# Altium PCB GT_16u2_Rev2.PcbDoc
Units mm, origin at the board's own origin, x right, y up, seen from the top; angles counter-clockwise.
Board outline 12.05 x 44.95 mm, 2 copper layers (Top Layer, Bottom Layer); 25 components, 23 nets, 90 pads, 26 vias.
Unrouted connection lines stored in the file: 2.
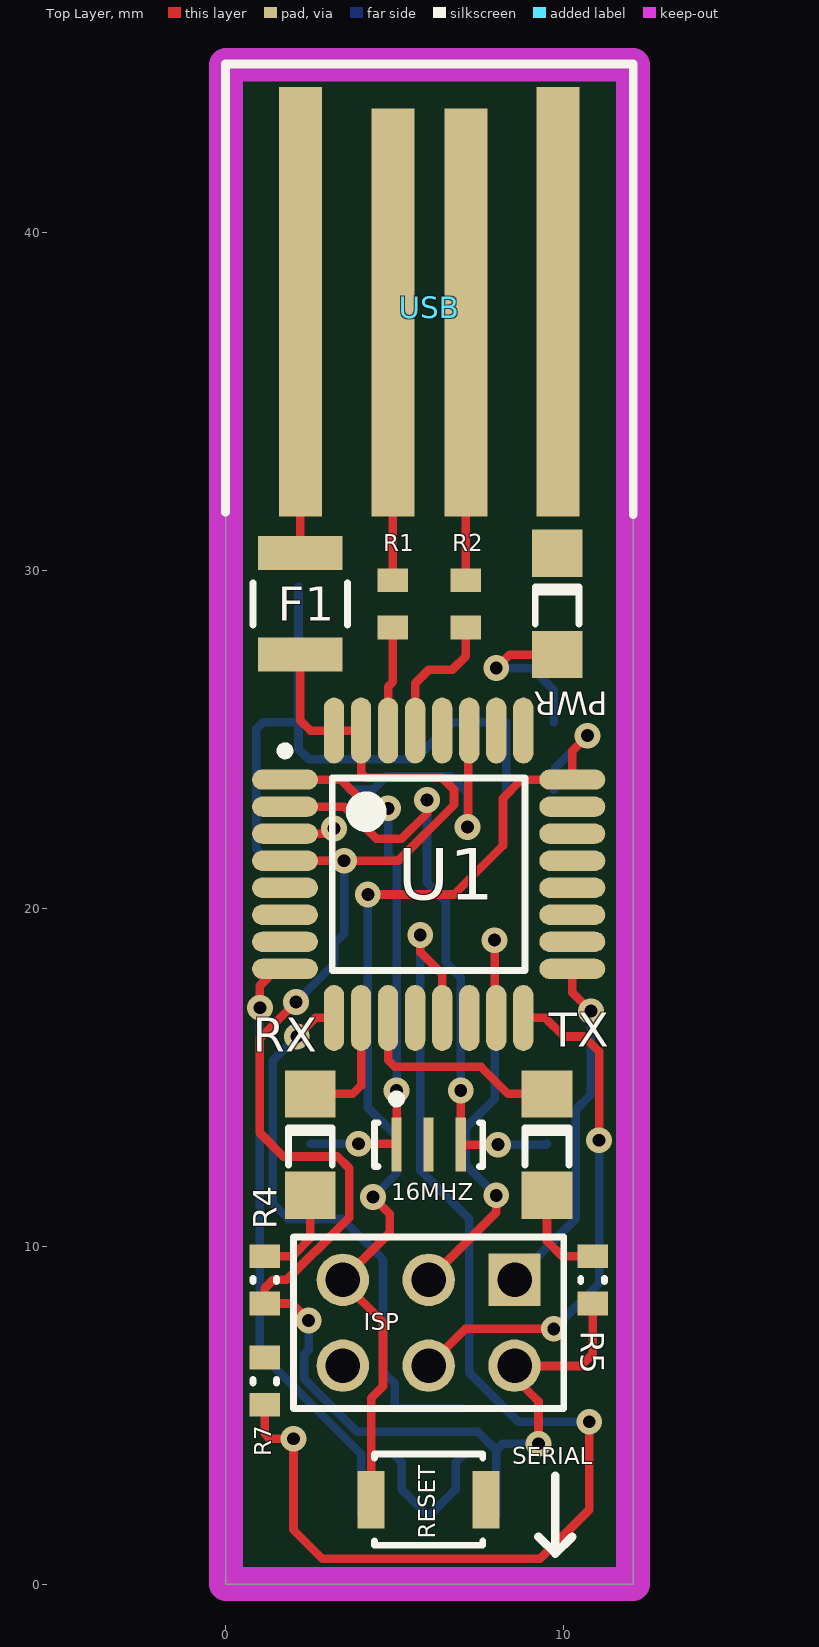
[diagram p0: Top Layer view]
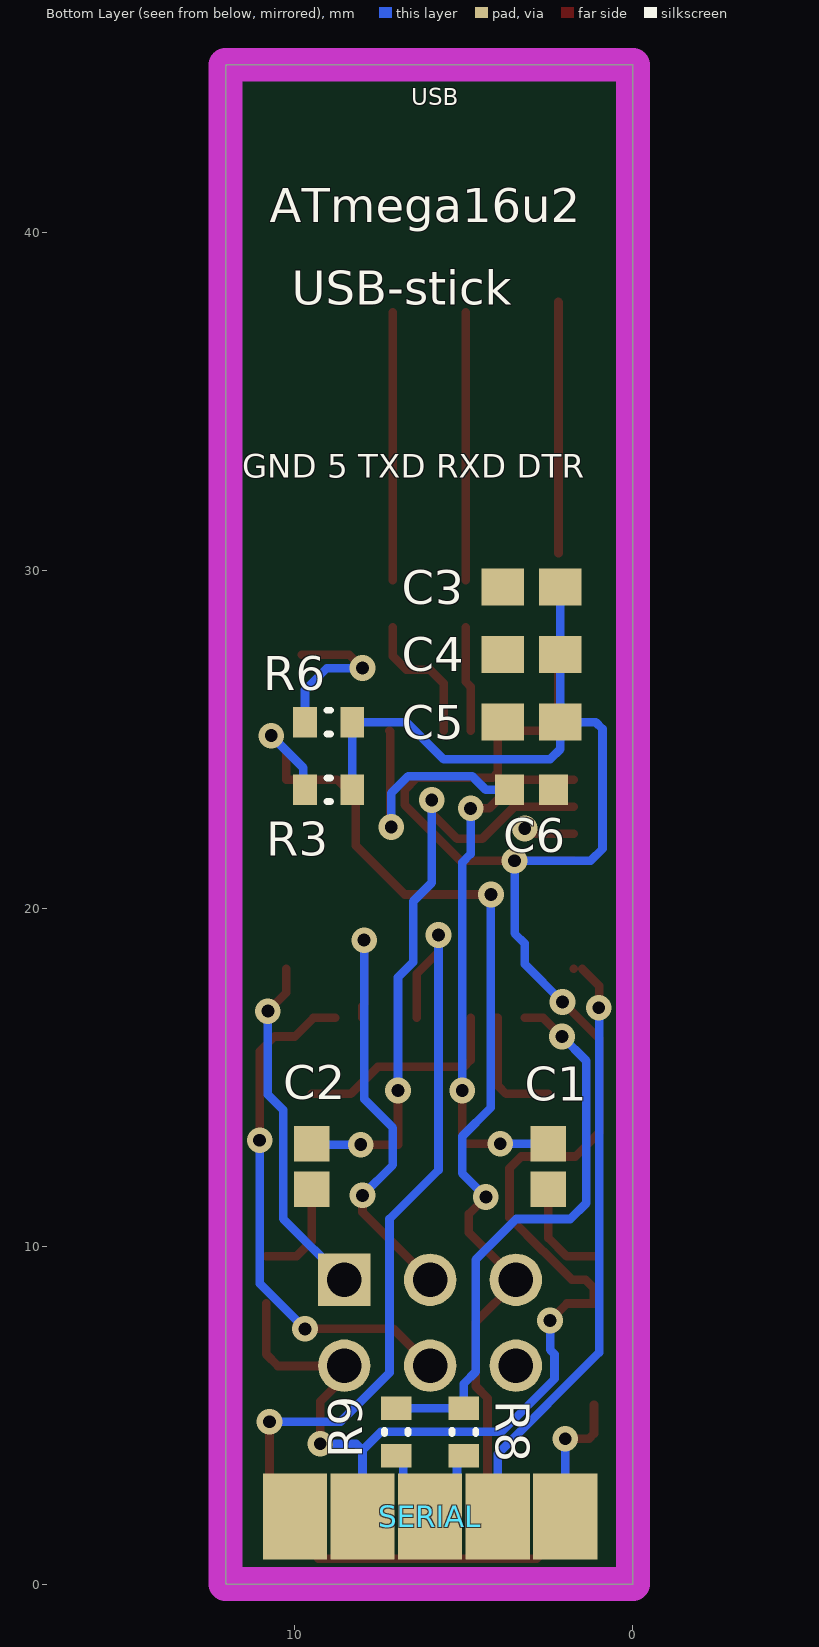
[diagram p1: Bottom Layer view, seen from below]

## Layer stack, top to bottom
Top Solder: solder mask 0.0102, Solder Resist, Dk 3.5
Top Layer: signal copper 0.0356
Dielectric 1: dielectric 0.32, FR-4, Dk 4.8
Bottom Layer: signal copper 0.0356
Bottom Solder: solder mask 0.0102, Solder Resist, Dk 3.5

## Board outline
12.05,0 0,0 0,44.95 12.05,44.95

## Design rules (kind name [scope] priority, off if disabled: settings)
Clearance [All] p1: gap=0.127 ignorepadtopadclearanceinfootprint=FALSE except(0: Arc-Hole Track-Hole SMDPad-SMDPad SMDPad-Hole THPad-Hole Via-Hole Fill-Hole Poly-Hole Region-Hole Text-Hole)
DiffPairsRouting [All] p1: maxlimit=0.254 minlimit=0.254 mostfreqgap=0.254 substack1={76AEA698-BA05-46CD-8F38-2EB70545F683} toplayer_{76aea698-ba05-46cd-8f38-2eb70545f683}_minwidth=0.381 toplayer_{76aea698-ba05-46cd-8f38-2eb70545f683}_maxwidth=0.381 toplayer_{76aea698-ba05-46cd-8f38-2eb70545f683}_prefwidth=0.381 bottomlayer_{76aea698-ba05-46cd-8f38-2eb70545f683}_minwidth=0.381 bottomlayer_{76aea698-ba05-46cd-8f38-2eb70545f683}_maxwidth=0.381 bottomlayer_{76aea698-ba05-46cd-8f38-2eb70545f683}_prefwidth=0.381 toplayer_minwidth=0.381 toplayer_maxwidth=0.381 toplayer_prefwidth=0.381 bottomlayer_minwidth=0.381 bottomlayer_maxwidth=0.381 bottomlayer_prefwidth=0.381 substack2={17D70BEA-12EE-4377-A149-2BB2C2ED7FCF} toplayer_{17d70bea-12ee-4377-a149-2bb2c2ed7fcf}_minwidth=0.381 toplayer_{17d70bea-12ee-4377-a149-2bb2c2ed7fcf}_maxwidth=0.381 toplayer_{17d70bea-12ee-4377-a149-2bb2c2ed7fcf}_prefwidth=0.381 bottomlayer_{17d70bea-12ee-4377-a149-2bb2c2ed7fcf}_minwidth=0.381 bottomlayer_{17d70bea-12ee-4377-a149-2bb2c2ed7fcf}_maxwidth=0.381 bottomlayer_{17d70bea-12ee-4377-a149-2bb2c2ed7fcf}_prefwidth=0.381 substack3={CADEAD71-19B0-48E9-878B-A2474DB00499} toplayer_{cadead71-19b0-48e9-878b-a2474db00499}_minwidth=0.381 toplayer_{cadead71-19b0-48e9-878b-a2474db00499}_maxwidth=0.381 toplayer_{cadead71-19b0-48e9-878b-a2474db00499}_prefwidth=0.381 bottomlayer_{cadead71-19b0-48e9-878b-a2474db00499}_minwidth=0.381 bottomlayer_{cadead71-19b0-48e9-878b-a2474db00499}_maxwidth=0.381 bottomlayer_{cadead71-19b0-48e9-878b-a2474db00499}_prefwidth=0.381 maxuncoupledlength=12.7
PolygonConnect [All] p1: connectstyle=Relief reliefconductorwidth=0.254 reliefentries=4 polygonreliefangle="90 Angle" airgapwidth=0.254
RoutingVias [All] p1: holewidth=0.711 width=1.27 viastyle="Through Hole" minholewidth=0.711 minwidth=1.27 maxholewidth=0.711 maxwidth=1.27
SolderMaskExpansion [All] p1: expansion=0.102 istentingtop=FALSE
Width [All] p1: maxlimit=0.254 minlimit=0.127 preferedwidth=0.254 substack1={76AEA698-BA05-46CD-8F38-2EB70545F683} toplayer_{76aea698-ba05-46cd-8f38-2eb70545f683}_minwidth=0.254 bottomlayer_{76aea698-ba05-46cd-8f38-2eb70545f683}_minwidth=0.254 substack2={17D70BEA-12EE-4377-A149-2BB2C2ED7FCF} toplayer_{17d70bea-12ee-4377-a149-2bb2c2ed7fcf}_minwidth=0.254 bottomlayer_{17d70bea-12ee-4377-a149-2bb2c2ed7fcf}_minwidth=0.254 substack3={CADEAD71-19B0-48E9-878B-A2474DB00499} toplayer_{cadead71-19b0-48e9-878b-a2474db00499}_minwidth=0.254 bottomlayer_{cadead71-19b0-48e9-878b-a2474db00499}_minwidth=0.254 minimp=50.000000 maximp=50.000000 favimp=50.000000
29 further rules are at their usual default settings.

## Components (designator, comment, footprint, x,y, rotation, side; value= is the part's Value field where it differs from the comment)
16MHZ "CSTCE16M0V53-R0" MURA-CSTCE_V-3_V 6,13 r0 top (schematic designator 16MHz)
C1 "22pF 50V 0603" CAPC1608X90X40ML10T20 2.5,12.35 r270 bottom
C2 "22pF 50V 0603" CAPC1608X90X40ML10T20 9.5,12.35 r90 bottom
C3 "100nF 16V 0603" CAPC1608X90X35ML15T15 3,29.5 r180 bottom
C4 "100nF 16V 0603" CAPC1608X90X35ML15T15 3,27.5 r180 bottom
C5 "100nF 16V 0603" CAPC1608X90X35ML15T15 3,25.5 r180 bottom
C6 "1uF 16V 0603" CAPC1608X90X35LL15T15 3,23.5 r0 bottom
F1 "MICROSMD050F-2" FP-microSMD-MFG 2.2,29 r270 top value=0.25-0.9Ω
ISP "TSW-103-08-F-D" SMTC-TSW-103-08-X-D 8.54,9 r180 top
PWR "150120BS75000" 1206_A 9.8,29 r270 top
R1 "22R 1% 0603" RESC1608X55X25NL10T15 4.942,29 r270 top
R2 "22R 1% 0603" RESC1608X55X25NL10T15 7.101,29 r270 top
R3 "1K 1% 0603" RESC0603(1608)_L 9,23.5 r180 bottom value="1000.00 Ohm"
R4 "1K 1% 0603" RESC0603(1608)_L 1.15,9 r270 top value="1000.00 Ohm"
R5 "1K 1% 0603" RESC0603(1608)_L 10.85,9 r270 top value="1000.00 Ohm"
R6 "1K 1% 0603" RESC0603(1608)_L 9,25.5 r180 bottom value="1000.00 Ohm"
R7 "1K 1% 0603" RESC0603(1608)_L 1.15,6 r270 top value="1000.00 Ohm"
R8 "1K 1% 0603" RESC0603(1608)_L 5,4.5 r270 bottom value="1000.00 Ohm"
R9 "1K 1% 0603" RESC0603(1608)_L 7,4.5 r270 bottom value="1000.00 Ohm"
RESET "B3U-1000P" FP-B3U-1000P-MFG 6,2.5 r180 top
RX "150120GS75000" 1206_A 2.5,13 r270 top
SERIAL "PinPad" PinPad 6,2 r180 bottom
TX "150120GS75000" 1206_A 9.5,13 r270 top
U1 "ATmega16U2-AU" 32A_M 6,21 r0 top
USB "USB-A" "USB A" 6.021,31.714 r0 top

## Footprints (in the part's own frame and the unit in brackets; to place one, negate y for a bottom-side part, rotate by r counter-clockwise, add the part's x,y. Pads: shape width x height; smd on the part's side, far side on the other; paste and mask are expansions set on the pad)
32A_M [mm] "Thin QFP, 32-Leads, Body 7x7mm, Pitch 0.8mm, IPC Low Density"
  oval 1.95x0.6 smd: 1(-4.25,2.8) 2(-4.25,2) 3(-4.25,1.2) 4(-4.25,0.4) 5(-4.25,-0.4) 6(-4.25,-1.2) 7(-4.25,-2) 8(-4.25,-2.8) 17(4.25,-2.8) 18(4.25,-2) 19(4.25,-1.2) 20(4.25,-0.4) 21(4.25,0.4) 22(4.25,1.2) 23(4.25,2) 24(4.25,2.8)
  oval 0.6x1.95 smd: 9(-2.8,-4.25) 10(-2,-4.25) 11(-1.2,-4.25) 12(-0.4,-4.25) 13(0.4,-4.25) 14(1.2,-4.25) 15(2,-4.25) 16(2.8,-4.25) 25(2.8,4.25) 26(2,4.25) 27(1.2,4.25) 28(0.4,4.25) 29(-0.4,4.25) 30(-1.2,4.25) 31(-2,4.25) 32(-2.8,4.25)
  silkscreen extent -4.37,-2.85 2.85,3.77, body extent -3.5,-3.5 3.5,3.5, height 1.2
1206_A [mm] "Chip LED, 2-Leads, Body 3.2x1.6mm, IPC Medium Density"
  rect 1.4x1.5 smd: 1(-1.5,0) 2(1.5,0)
  silkscreen extent -0.5,-0.66 0.6,0.65, body extent -1.6,-0.8 1.6,0.8, height 0.68
CAPC1608X90X35LL15T15 [mm] "Chip Capacitor, 2-Leads, Body 1.60x0.81mm, IPC High Density"
  rect 0.85x0.9 smd: 1(-0.65,0) 2(0.65,0)
  body extent -0.88,-0.48 0.87,0.48, height 0.9
CAPC1608X90X35ML15T15 [mm] "Chip Capacitor, 2-Leads, Body 1.60x0.81mm, IPC Low Density"
  rect 1.25x1.1 smd: 1(-0.85,0) 2(0.85,0)
  body extent -0.88,-0.48 0.87,0.48, height 0.9
CAPC1608X90X40ML10T20 [mm] "Chip Capacitor, 2-Leads, Body 1.7x0.9mm, IPC Low Density"
  rect 1.05x1.05 smd: 1(-0.675,0) 2(0.675,0)
  body extent -0.85,-0.45 0.85,0.45, height 0.9
FP-B3U-1000P-MFG [mm]
  rect 0.8x1.7 smd paste+0 mask+0: 1(-1.7,0) 2(1.7,0)
  silkscreen extent -1.6,-1.35 1.6,1.35, body extent -2.2,-1.45 2.2,1.45, height 0.25
FP-microSMD-MFG [mm]
  rect 1x2.5 smd paste+0 mask+0: 1(-1.5,0) 2(1.5,0)
  silkscreen extent -0.63,-1.4 0.63,1.4, body extent -2.1,-1.5 2.1,1.5, height 0.25
MURA-CSTCE_V-3_V [mm] "SMD, 3-Leads, Body 3.2x1.3mm, Pitch 0.95mm"
  rect 0.3x1.6 smd: 1(-0.95,0) 2(0,0) 3(0.95,0)
  silkscreen extent -1.6,-0.65 1.6,1.47, body extent -1.6,-0.65 1.6,0.65, height 1
PinPad [mm]
  rect 1.9x2.54 smd mask+0.05: 1(-4,0) 2(-2,0) 3(0,0) 4(2,0) 5(4,0)
RESC0603(1608)_L [mm] "Chip Resistor, Body 1.6x0.8mm, IPC High Density"
  rect 0.7x0.9 smd: 1(-0.7,0) 2(0.7,0)
  silkscreen extent -0.05,-0.35 0.05,0.35, body extent -0.85,-0.47 0.85,0.47, height 0.6
RESC1608X55X25NL10T15 [mm] "Chip Resistor, 2-Leads, Body 1.70x0.90mm, IPC Medium Density"
  rect 0.7x0.9 smd: 1(-0.7,0) 2(0.7,0)
  body extent -0.85,-0.45 0.85,0.45, height 0.55
SMTC-TSW-103-08-X-D [mm] ".025 SQ Post Terminal Strip Assembly, 2x3 Pins, Vertical, 2.54mm Pitch, Male"
  rect 1.55x1.55 hole 1.02: 1(0,0)
  round 1.55 hole 1.02: 2(0,2.54) 3(2.54,0) 4(2.54,2.54) 5(5.08,0) 6(5.08,2.54)
  silkscreen extent -1.46,-1.27 6.54,3.81, body extent -1.27,-1.27 6.35,3.81, height 8.38
"USB A" [mil]
  rect 50x500 smd: 1(-150,245) 4(150,245)
  rect 50x475 smd: 2(-42.5,232.5) 3(42.5,232.5)
  silkscreen extent -238,-3 237,522

## Part data
16MHZ: library part CMP-0588-00001-2, "Ceramic Resonator, 16 MHz with Built-in Capacitance, Thickness Expander Mode, Initial Frequency Tolerance +/- 0.5%, Load Capacity 15 pF, -20 to 80 degC, 3.2 x 1.3 x 1 mm SMD, RoHS, Reel", Initial Frequency Tolerance="+/- 0.5%", Load Capacity="15 pF", Manufacturer=Murata, Operating Temperature Range="-20 to 80 degC", Oscillating Frequency="16 MHz", ComponentLink1Description="Manufacturer URL", ComponentLink1URL=http://www.murata.com/, ComponentLink2Description=Datasheet, ComponentLink2URL=http://www.murata.com/products/catalog/pdf/p16e.pdf, DatasheetVersion="Rev. P16E-22", Initial Tolerance="+/- 0.5%", Mounting Technology="Surface Mount", PackageDescription="3-Pin SMD, Body 3.2 x 1.3 mm, Pitch 0.95 mm", PackageReference=CSTCE_V-3, Packing=Reel, PartNumber=CSTCE16M0V53-R0, RoHS=TRUE
C1 C2: library part CMP-1659-00006-3, "Chip Capacitor, 22 pF, +/- 5%, 50 V, -55 to 125 degC, 0603 (1608 Metric), RoHS, Tape and Reel", Max Operating Temperature="125 degC", Min Operating Temperature="-55 degC", DatasheetVersion="Rev. 13, 05/2016", Length="1.6 mm", Mount="Surface Mount", Mounting Technology="Surface Mount", PackageDescription="2-Pin Surface Mount Device, Body 1.6 x 0.8 mm", PackageReference=0603, RoHSCompliant=true
C3 C4 C5: library part CMP-2006-04496-1, Manufacturer="AVX Interconnect / Elco", Part Number=0603YC104KAZ2A
C6: library part CMP-2006-04532-1, Manufacturer="AVX Interconnect / Elco", Part Number=0603YD105KAT2A
F1: library part CMP-08606-000015-1, "PTC RESET FUSE 13.2V 500MA 1210", Ambient Temperature Range High=+85°C, Ambient Temperature Range Low=-40°C, Current Rating=40A, Hold Current=0.5A, Manufacturer=Littelfuse, Package=microSMD, Resistance=0.25-0.9Ω, Temperature="to +85°C", Trip Current=1A, Voltage Rating=13.2V, Automotive=No, Category=Fuse, ComponentLink2Description=Datasheet, ComponentLink2URL=https://www.littelfuse.com/~/media/electronics/datasheets/resettable_ptcs/littelfuse_ptc_microsmd_datasheet.pdf.pdf, Device Class L1="Circuit Protection", Device Class L2="PTC Resettable Fuses", Device Class L3=unset, Digikey Description="PTC RESET FUSE 13.2V 500MA 1210", Height=0.62mm, Lead Free=Yes, Manufacturer Part Number=MICROSMD050F-2, Octopart=https://octopart.com/microsmd050f-2-littelfuse-74214982, RoHS=TRUE, Temperature Range High=+85°C, Trip Time=0.05s
ISP: library part CMP-1024-00337-1, Manufacturer=Samtec, Temperature Range="-55 to 125 degC", ComponentLink1Description="Manufacturer URL", ComponentLink1URL=http://www.samtec.com, ComponentLink2Description=Datasheet, ComponentLink2URL=http://www.samtec.com/documents/webfiles/pdf/TSW_TH.PDF, ComponentLink3Description="Package Specification", ComponentLink3URL=http://www.samtec.com/documents/webfiles/cpdf/TSW-XXX-XX-XXX-X-XX-XXX-MKT.pdf, DatasheetVersion=F-214, Mounting Technology=Through-hole, Orientation=Vertical, PackageDescription=".025[0.64] SQ. Post Terminal Strip Assembly", PackageReference=TSW-103-08-X-D, PackageVersion="DM, 8/1988", PartNumber=TSW-103-08-F-D, Pitch="2.54 mm", RoHS=True
PWR: library part CMP-1426-00015-1, "SMD mono-color Chip LED, WL-SMCW, Blue", Color=Blue, Manufacturer="Wuerth Elektronik", ComponentLink1Description="Manufacturer URL", ComponentLink1URL=http://www.we-online.com, ComponentLink2Description=Datasheet, ComponentLink2URL=http://katalog.we-online.com/led/datasheet/150120BS75000.pdf, PackageReference=1206_A, PartNumber=150120BS75000
R1 R2: library part CMP-1659-00033-1, "Chip Resistor, 22 Ohm, +/- 1%, 0.1 W, -55 to 155 degC, 0603 (1608 Metric), RoHS, Tape and Reel", Case\Package=SIP, Max Input Voltage="1.4 V", Max Operating Temperature="100 degC", Max Ouput Current="8 A", Min Operating Temperature="-25 degC", Package Quantity=200, ComponentLink1Description="Manufacturer URL", ComponentLink1URL=http://www.yageo.com/, ComponentLink2Description=Datasheet, ComponentLink2URL=http://www.yageo.com/documents/recent/PYu-RC_Group_51_RoHS_L_04.pdf, DatasheetVersion="Rev. 4, 02/2016", Height="19.6 mm", Length="18.5 mm", Mount="Through Hole", Output Current="8 A", PackageDescription="2-Pin Surface Mount Device, Body 1.6 x 0.8 mm", PackageReference=0603, Packaging=Rail/Tube, Pins=4, Radiation Hardening=No, REACH SVHC=Unknown, RoHSCompliant=true
R3 R4 R5 R6 R7 R8 R9: library part CMP-1012-00074-1, "1K 0.1W 5% 0603 (1608 Metric)  SMD", Case-EIA=0603, Case-Metric=1608, Power="0.1 W", Tolerance="5 %", Technology=SMT
RESET: library part CMP-2100-03586-2, "SWITCH TACTILE SPST-NO 0.05A 12V", Contact Current Rating=50mA, Contact Resistance=100mR, Insulation Resistance=100MR, Max Operating Temperature=70°C, Max Voltage Rating (DC)=12V, Min Operating Temperature=-25°C, Operating Force=1.5N, Package Quantity=1, Ratings="Dust Proof", Actuator Length=0.4mm, Actuator Type=Standard, Contact Material=Silver, Current Rating=50mA, Depth=2.5mm, Electrical Life=200000Cycles, Height=1.2mm, Illumination Type=Non-Illuminated, Lead Free="Lead Free", Length=4mm, Max Current Rating=50mA, Mechanical Life=200000Cycles, Mount="Surface Mount", Orientation=Straight, Packaging="Tape and Reel", Switch Function=Off-Mom, Switch Travel=0.15mm, Termination=SMD/SMT, Throw Configuration=SPST, Voltage Rating (DC)=12V, Weight=0.000776oz, Width=3mm
RX TX: library part CMP-1426-00014-1, "SMD mono-color Chip LED, WL-SMCW, Green", Color=Green, Manufacturer="Wuerth Elektronik", ComponentLink1Description="Manufacturer URL", ComponentLink1URL=http://www.we-online.com, ComponentLink2Description=Datasheet, ComponentLink2URL=http://katalog.we-online.com/led/datasheet/150120GS75000.pdf, PackageReference=1206_A, PartNumber=150120GS75000
U1: library part CMP-0095-00303-2, "8-bit AVR Microcontroller, 2.7-5.5V, 16KB Flash, 512 Bytes EEPROM, 512 Bytes SRAM, 32-pin TQFP, Industrial Grade (-40°C to 85°C)", Code_JEDEC=MS-026-ABA, ComponentLink1Description="Manufacturer URL", ComponentLink1URL=http://www.atmel.com/, ComponentLink2Description="ATmega8U2/16U2/32U2 Datasheet", ComponentLink2URL=http://www.atmel.com/dyn/resources/prod_documents/doc7799.pdf, ComponentLink3Description="ATmega8U2/16U2/32U2 Summary", ComponentLink3URL=http://www.atmel.com/dyn/resources/prod_documents/7799S.pdf, DatasheetVersion="revD, Nov-2010", PackageDescription="32-Lead, 7x7x1.0 mm Body, 0.8mm Lead Pitch, Thin Profile Plastic Quad Flat Package (TQFP)", PackageReference=32A, PackageVersion="revC, Oct-2010", RevisionNote="DatasheetVersion & PackageVersion updated. URLs added."

## Via types
v1: diameter 0.762, hole 0.381, Top Layer to Bottom Layer, 26 vias

## Nets (pads, with @x,y where several pads share a name; then routed paths per layer and width w, separated by ;. In a path a pad name is that pad's centre, name@x,y a point inside that pad or via, vN(x,y) a via of type N, cw(c..) or ccw(c..) an arc to the next point about the centre after c; other vN are vias at no path point)
+5V: C3.2 C4.2 C5.2 F1.2 ISP.2 R3.2 R4.2 R5.2 R6.2 SERIAL.2 U1.4 U1.31 U1.32 | length 72.5
  Top Layer w0.254: U1.4 1.85,21.4 v1(3.5,21.4) 5.1,21.4 6.75,23.05 6.75,23.5 6.399,23.851 4.149,23.851 4,24 U1.31 3.9,25.25 U1.32 2.5,25.25 2.2,25.55 F1.2 ; v1(2.079,17.222) 1,16.143 1,13.35 1.7,12.65 3.3,12.65 3.65,12.3 3.65,10.841 2.657,9.847 2.647,9.847 1.8,9 1.4,9 1.15,8.75 R4.2 1.95,8.3 v1(2.45,7.8) ; v1(9.25,4.15) 9.25,5.399 8.54,6.109 ISP.2 8.55,6.45 10.5,6.45 10.85,6.8 R5.2
  Bottom Layer w0.254: v1(2.079,17.222) 3.2,18.343 3.2,18.95 3.5,19.25 v1(3.5,21.4) 1.25,21.4 0.9,21.75 0.9,25.3 1.1,25.5 C5.2 ; C3.2 C4.2 C5.2 ; v1(2.45,7.8) 2.45,6.931 2.319,6.801 2.319,6.069 3.889,4.5 7.459,4.5 8,3.959 ; SERIAL.2 8,2.1 8,3.959 ; R3.2 R6.2 6.7,25.5 5.6,24.4 2.45,24.4 2.15,24.7 C5.2 ; v1(9.25,4.15) 8.191,4.15 8,3.959
DTR(CTS): R7.2 SERIAL.5 U1.13 | length 39.5
  Top Layer w0.254: R7.2 1.15,5.25 1.15,4.45 1.299,4.301 1.999,4.301 v1(2,4.3) 1.95,4.25 2,4.2 2,1.6 2.846,0.754 9.304,0.754 10.75,2.2 v1(10.75,4.8) ; v1(5.75,19.2) 5.75,18.7 6.4,18.05 6.4,16.85 U1.13
  Bottom Layer w0.254: SERIAL.5 v1(2,4.3) ; v1(5.75,19.2) 5.75,12.25 7.2,10.8 7.2,6.25 8.65,4.8 v1(10.75,4.8)
GND: 16MHZ.2 C1.2 C2.1 C3.1 C4.1 C5.1 C6.1 ISP.6 PWR.1 R7.1 RESET.1 SERIAL.1 U1.3 U1.28 USB.4 | length 1.5
  Top Layer w0.254: U1.3 1.8,22.2 3.05,22.2 v1(3.2,22.35)
LED-RX: RX.1 U1.10 | length 3.7
  Top Layer w0.254: RX.1 3.75,14.5 4,14.75 4,16.7 4.05,16.75 U1.10
LED-TX: TX.1 U1.11 | length 6.4
  Top Layer w0.254: U1.11 4.8,15.5 5,15.3 7.55,15.3 8.35,14.5 TX.1
MISO: ISP.1 U1.17 | length 10.4
  Top Layer w0.254: U1.17 10.25,17.5 v1(10.8,16.95)
  Bottom Layer w0.254: ISP.1 10.35,10.81 10.35,14.031 10.8,14.481 v1(10.8,16.95) v1@10.75,17
MOSI: ISP.4 U1.16 | length 15.6
  Top Layer w0.254: ISP.4 7.09,7.55 v1(9.7,7.55) ; U1.16 9.45,16.75 10,16.2 10.6,16.2 11.042,15.758 v1(11.042,13.129)
  Bottom Layer w0.254: v1(9.7,7.55) 11.042,8.892 v1(11.042,13.129)
Net16Mhz_1: 16MHZ.1 C1.1 U1.1 | length 16
  Top Layer w0.254: U1.1 3.4,23.8 4.25,22.95 v1(4.8,22.95) ; v1(3.925,13.025) 5.027,13.025 16MHZ.1@5.05,13.002 ; 16MHZ.1 16MHZ.1@5.05,13.002 ; v1(5.05,14.6) 16MHZ.1@5.05,13.002
  Bottom Layer w0.254: C1.1 v1(3.925,13.025) ; v1(4.8,22.95) 4.8,21.6 5.05,21.35 v1(5.05,14.6)
Net16MHz_3: 16MHZ.3 C2.2 U1.2 | length 18.6
  Top Layer w0.254: U1.2 3.507,23 4.457,22.05 5.2,22.05 5.95,22.8 v1(5.95,23.2) ; v1(6.95,14.6) 16MHZ.3 v1(8.052,13)
  Bottom Layer w0.254: v1@5.853,23.103 v1(5.95,23.2) 5.95,20.75 6.5,20.2 6.5,18.4 6.95,17.95 v1(6.95,14.6) ; v1(8.052,13) 9.475,13 C2.2
NetC6_2: C6.2 U1.27 | length 7.7
  Top Layer w0.254: v1@7.175,22.425 7.175,25.225 U1.27
  Bottom Layer w0.254: C6.2 4.35,23.5 4.75,23.9 6.65,23.9 7.15,23.4 v1(7.15,22.4)
NetF1_1: F1.1 USB.1 | length 7.4
  Top Layer w0.254: F1.1 2.2,37.926 USB.1
NetPWR_2: PWR.2 R6.1 | length 4.9
  Top Layer w0.254: v1(8,27.1) 8.4,27.5 PWR.2
  Bottom Layer w0.254: v1(8,27.1) 9.05,27.1 9.7,26.45 R6.1
NetR4_1: R4.1 RX.2 | length 2.8
  Top Layer w0.254: R4.1 1.961,9.7 2.5,10.239 RX.2
NetR5_1: R5.1 TX.2 | length 2.9
  Top Layer w0.254: TX.2 9.5,10.15 9.95,9.7 R5.1
RESET: ISP.5 R3.1 RESET.2 U1.24 | length 31.7
  Top Layer w0.254: v1(4.2,20.4) 6.75,20.4 8.2,21.85 8.2,23.25 8.75,23.8 U1.24 10.25,24.65 v1(10.7,25.1) ; RESET.2 4.3,5.5 4.65,5.85 4.65,7.75 3.46,8.94 ISP.5 4.85,10.39 4.85,10.95 v1(4.35,11.45)
  Bottom Layer w0.254: v1(4.2,20.4) 4.2,14.1 5.05,13.25 5.05,12.15 v1(4.35,11.45) ; R3.1 9.75,23.55 9.75,24.15 v1(10.7,25.1)
RXD: SERIAL.4 U1.8 | length 17.7
  Top Layer w0.254: v1(1.008,17.05) 1,17.058 1,17.7 U1.8@1.5,18.2
  Bottom Layer w0.254: v1(1.008,17.05) 1,17.042 1,6.85 4,3.85 SERIAL.4
SCK: ISP.3 U1.15 | length 13.9
  Top Layer w0.254: ISP.3 8,11 v1(8,11.5) ; v1(7.95,19.05) 7.95,17.15 8,17.1 U1.15
  Bottom Layer w0.254: v1(7.95,19.05) 7.95,14.35 7.1,13.5 7.1,12.4 v1(8,11.5)
TXD: R8.2 R9.2 SERIAL.3 | length 4.4
  Bottom Layer w0.254: R8.2 5.204,3.596 5.204,2.796 SERIAL.3 6.796,2.796 6.796,3.596 R9.2
TXDR: R8.1 R9.1 U1.9 | length 17.1
  Top Layer w0.254: v1(2.1,16.2) 2.65,16.75 U1.9
  Bottom Layer w0.254: v1(2.1,16.2) 1.381,15.481 1.381,11.269 1.85,10.8 3.45,10.8 4.65,9.6 4.65,6.281 5,5.931 R8.1 R9.1
USBDM: R1.1 USB.2 | length 7.9
  Top Layer w0.254: R1.1 USB.2
USBDM-R: R1.2 U1.30 | length 3.1
  Top Layer w0.254: U1.30 4.8,26.55 4.942,26.692 R1.2
USBDP: R2.1 USB.3 | length 7.9
  Top Layer w0.254: R2.1 USB.3
USBDP-R: R2.2 U1.29 | length 4.1
  Top Layer w0.254: U1.29 5.6,25.4 5.6,26.65 6,27.05 6.7,27.05 7.101,27.451 R2.2
pads on no net: U1.5 U1.6 U1.7 U1.12 U1.14 U1.18 U1.19 U1.20 U1.21 U1.22 U1.23 U1.25 U1.26

## Polygon pours and split planes (outlines as drawn)
GND on Top Layer "gnd-top" (solid, shelved, pour order 0): 0,44.95 12.05,44.95 12.05,0 0,0
GND on Bottom Layer "gnd-bottom" (solid, shelved, pour order 1): 0,44.95 12.05,44.95 12.05,0 0,0

## Keep-outs
Keep-Out Layer:
  the board outline again, w1

## Silkscreen, mask and mechanical layers (free items; w line width, h text height)
Top Overlay:
  lines w0.254: 9.25,1.4 9.75,0.9 ; 9.75,3.2 9.75,0.9 ; 10.25,1.4 9.75,0.9
Bottom Overlay:
  text "ATmega16u2" at 10.746,40.287 h1
  text "USB-stick" at 10.096,37.854 h1
  text "GND 5 TXD RXD DTR" at 11.554,32.727 h0.7